# Altium PCB Conv_buck_R0.PcbDoc
Units mil, origin at the board's own origin, x right, y up, seen from the top; angles counter-clockwise.
Board outline 3937.01 x 5905.51 mil, 4 copper layers (Top Layer, Mid 1, Mid 2, Bottom Layer), stack 62.047 mil thick; 149 components, 73 nets, 409 pads, 0 vias.
Unrouted connection lines stored in the file: 294.
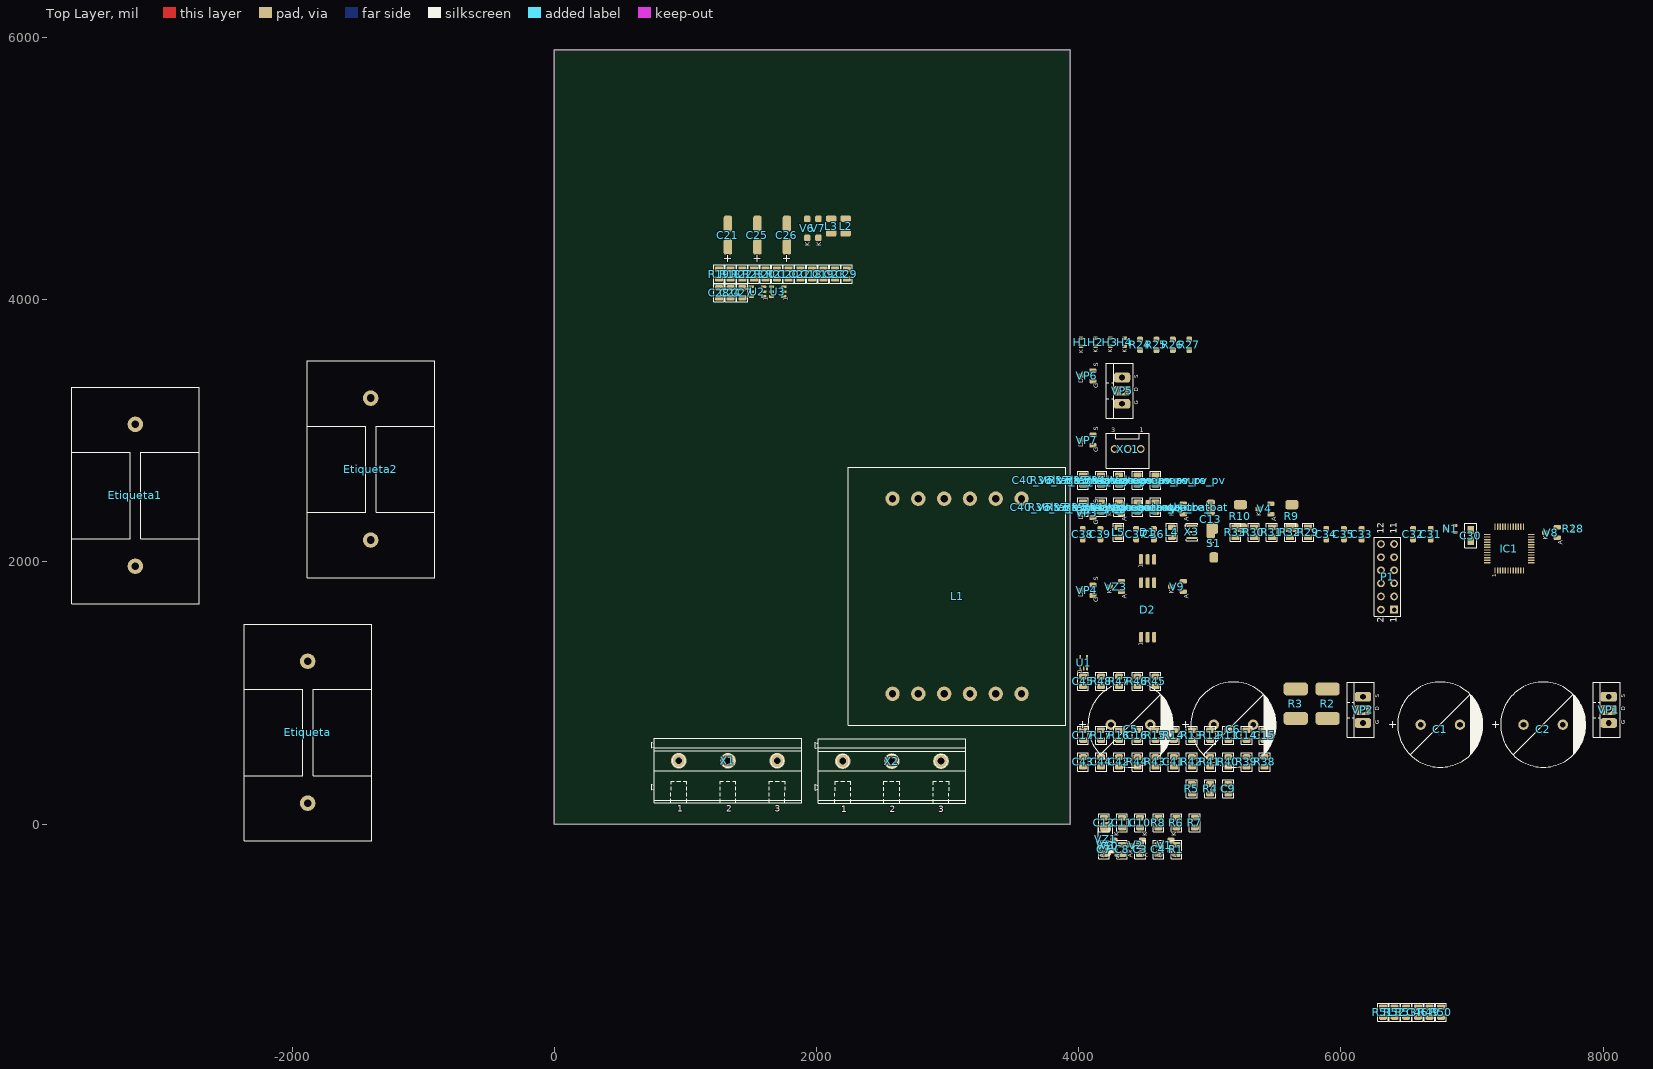
[diagram p0: Top Layer view]
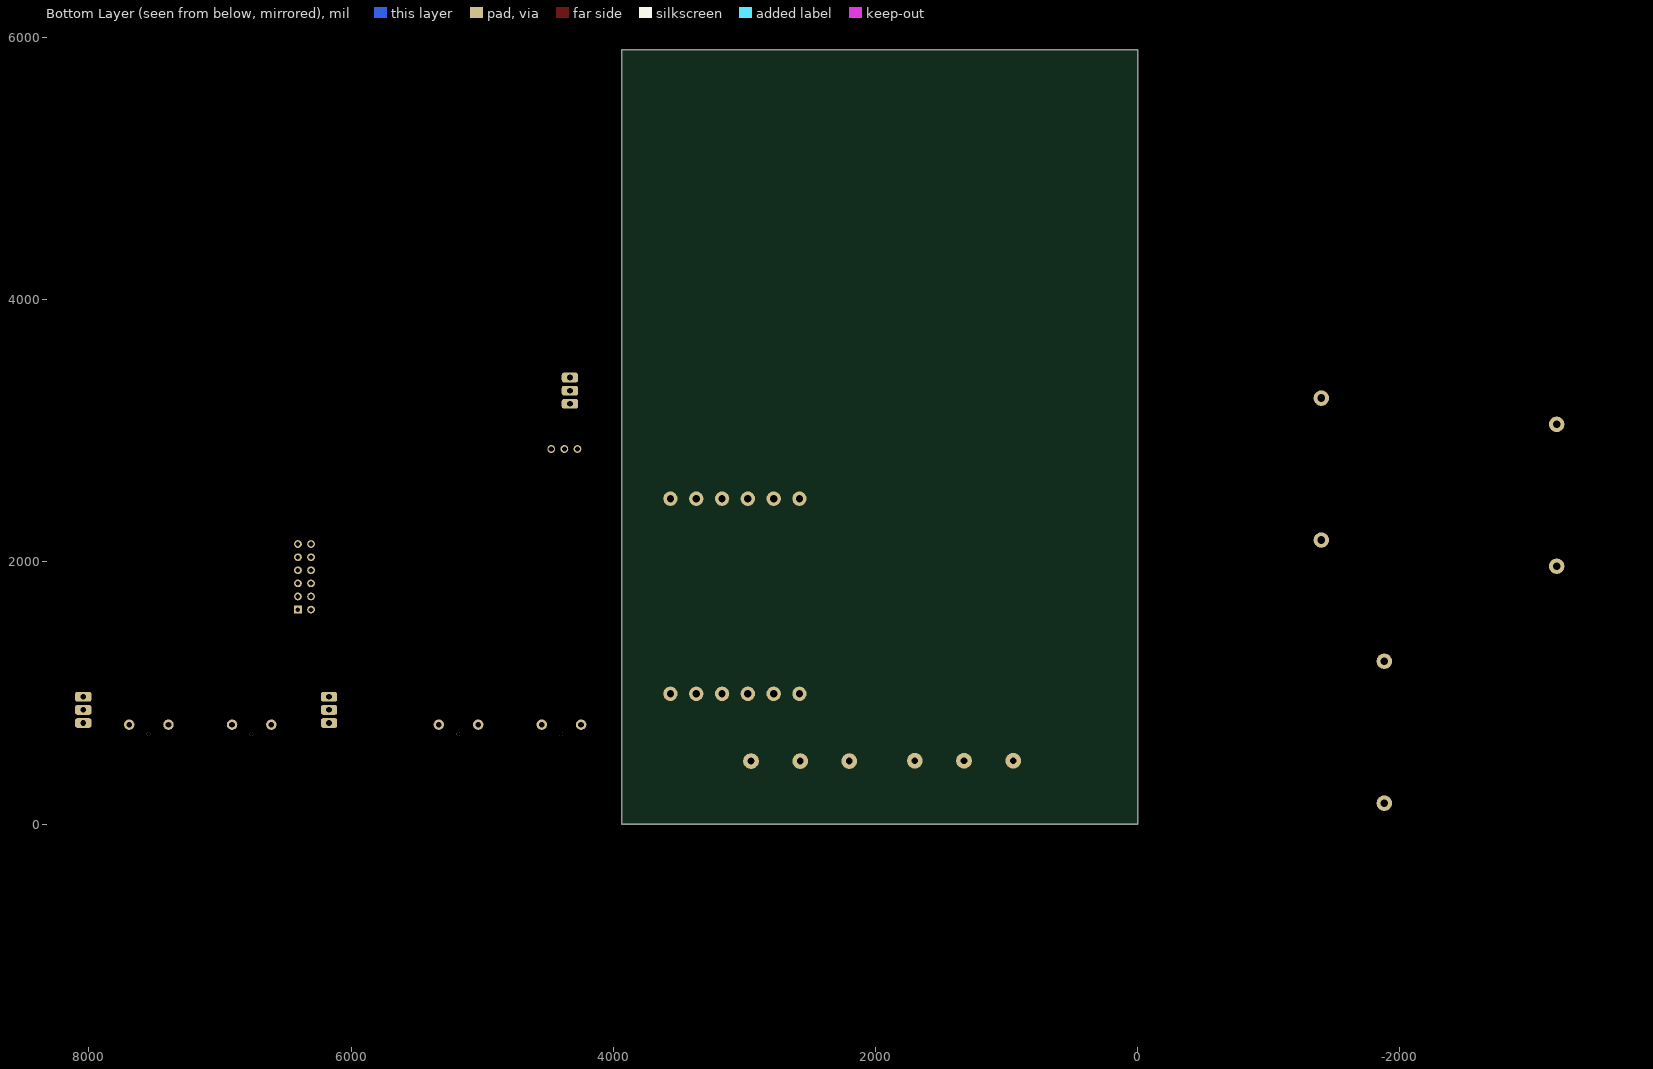
[diagram p1: Bottom Layer view, seen from below]

## Layer stack, top to bottom
Top Layer: signal copper 12.4016
Dielectric: prepreg 5, FR-4, Dk 4.2
Mid 1: signal copper 1.4173
Dielectric: core 24.4094, Dk 4.2
Mid 2: signal copper 1.4173
Dielectric: prepreg 5, Dk 4.2
Bottom Layer: signal copper 12.4016

## Board outline
0,0 3937.01,0 3937.01,5905.51 0,5905.51

## Design rules (kind name [scope] priority, off if disabled: settings)
AssemblyTestPointUsage [All] p1 off:
AssemblyTestpoint [All] p1 off: testpointundercomponent=TRUE minsize=40 maxsize=100 preferedsize=60 minholesize=0 maxholesize=40 preferedholesize=32 testpointgrid=1 usegrid=FALSE gridtolerance=0.01 allowsidebottom=TRUE minspacing=100
Clearance Terra [InNetClass('Terra') vs InNetClass('-UD') OR InNetClass('DGND')] p1: gap=315
Clearance -UD [InNetClass('-UD') vs InNetClass('Terra') OR InNetClass('DGND')] p2: gap=315
Clearance DGND [InNetClass('DGND') vs InNetClass('Terra') OR InNetClass('-UD')] p3: gap=315
Clearance "Mec Holes" [InNetClass('All Nets') vs InPadClass('Mec Holes')] p4: gap=12
Clearance "Fix Holes" [InNetClass('All Nets') vs InPadClass('Fix Holes')] p5: gap=196.85
Clearance "Keepout Clearance" [InNetClass('All Nets') vs IsKeepOut] p6: gap=11.82
Clearance "Clearance All 10mils" [All] p7: gap=9
ComponentClearance [All] p1 off: gap=10 collisioncheckmode=3 verticalgap=10 showdistances=FALSE
FabricationTestpoint [All] p1: side=2 testpointundercomponent=TRUE minsize=40 maxsize=100 preferedsize=60 minholesize=0 maxholesize=40 preferedholesize=32 testpointgrid=1 allowsidebottom=TRUE usegrid=FALSE gridtolerance=0.01 minspacing=100
FanoutControl Fanout_BGA [IsBGA] p1 off: bgadir=Out bgaviamode=Centered fanoutstyle=Auto fanoutdirection=Alternating viagrid=1 // Fanout_BGA (Default Rule)
FanoutControl Fanout_LCC [IsLCC] p2 off: bgadir=Out bgaviamode=Centered fanoutstyle=Auto fanoutdirection=Alternating viagrid=1 // Fanout_LCC (Default Rule)
FanoutControl Fanout_SOIC [IsSOIC] p3 off: bgadir=Out bgaviamode=Centered fanoutstyle=Auto fanoutdirection=Alternating viagrid=1 // Fanout_SOIC (Default Rule)
FanoutControl Fanout_Small [(CompPinCount < 5)] p4 off: bgadir=Out bgaviamode=Centered fanoutstyle=Auto fanoutdirection=OutThenIn viagrid=1 // Fanout_Small (Default Rule)
FanoutControl Fanout_Default [All] p5 off: bgadir=Out bgaviamode=Centered fanoutstyle=Auto fanoutdirection=Alternating viagrid=1 // Fanout_Default (Default Rule)
Height [All] p1 off: minheight=0 maxheight=1000 prefheight=500
HoleSize [All] p1: absolutevalues=TRUE maxlimit=393.7 minlimit=7.87 maxpercent=80.000 minpercent=20.000
MinimumSolderMaskSliver [All] p1 off: minsoldermaskwidth=10
NetAntennae [All] p1 off: netantennaetolerance=0
PolygonConnect "PolygonConnect Power" [InNetClass('All Nets') vs InNetClass('All Nets')] p1: connectstyle=Direct reliefconductorwidth=10 reliefentries=4 polygonreliefangle="90 Angle"
PolygonConnect [All] p2: connectstyle=Direct reliefconductorwidth=10 reliefentries=4 polygonreliefangle="90 Angle"
RoutingCorners [All] p1 off: cornerstyle=45-Degree minsetback=100 maxsetback=100
RoutingVias [All] p1: holewidth=11.81 width=25 viastyle="Through Hole" minholewidth=7.87 minwidth=25 maxholewidth=20 maxwidth=50
SilkToSilkClearance [All] p1 off: silktosilkclearance=10
SilkscreenOverComponentPads SilkToSolderMaskClearance [IsPad] p1 off: minsilkscreentomaskgap=10
SolderMaskExpansion [All] p1: expansion=4
Width [All] p1: maxlimit=500 minlimit=9 preferedwidth=10
12 further rules are at their usual default settings.

## Classes and differential pairs
component class uC: C30 C31 C32 C33 C34 C35 C36 C37 C38 C39 H1 H2 H3 H4 IC1 L4 L5 N1 P1 R24 R25 R26 R27 R28 R29 R30 R31 R32 R33 S1 V8 X3
channel class Voltage_measure: Voltage_measure_bat Voltage_measure_pv
component class Voltage_measure_pv: C40_Voltage_measure_pv R34_Voltage_measure_pv R35_Voltage_measure_pv R36_Voltage_measure_pv R37_Voltage_measure_pv
component class Voltage_measure_bat: C40_Voltage_measure_bat R34_Voltage_measure_bat R35_Voltage_measure_bat R36_Voltage_measure_bat R37_Voltage_measure_bat
component class SMPS: C18 C19 C20 C21 C22 C23 C24 C25 C26 C27 C28 C29 L2 L3 R18 R19 R20 R21 R22 R23 U2 U3 V6 V7
component class Output: C45 R45 R46 R47 R48 VP5 VP6
component class Current_measure_bat: C9 C10 C11 C12 R4 R5 R6 R7 R8 U1
component class Driver_rect: C41 C42 C43 C44 D2 R38 R39 R40 R41 R42 R43 R44 V9 VP4 VZ3
component class FAN: C46 R49 R50 R51 R52 R53 V10 VP7 XC1
component class Buck_converter: V1 V2 V3
component class Converter: C1 C2 C3 C4 C5 C6 C7 C8 L1 R1 R2 R3 VP1 VP2 X1 X2
component class Driver_SW: C13 C14 C15 C16 C17 D1 R9 R10 R11 R12 R13 R14 R15 R16 R17 V4 V5 VP3 VZ1 VZ2

## Components (designator, comment, footprint, x,y, rotation, side; value= is the part's Value field where it differs from the comment)
C1 "10190340" "CR 1.1 7.62 16.5" 6608.74,758.17 r0 top
C2 "10190340" "CR 1.1 7.62 16.5" 7393.74,758.17 r0 top
C3 "10192075" C0805_R_V0 4468.74,-194.33 r90 top
C4 "11736520" C0805_R_V0 4608.74,-194.33 r90 top
C5 "10190340" "CR 1.1 7.62 16.5" 4246.24,758.17 r0 top
C6 "10190340" "CR 1.1 7.62 16.5" 5031.24,758.17 r0 top
C7 "10192075" C0805_R_V0 4193.74,-194.33 r90 top
C8 "11736520" C0805_R_V0 4331.24,-194.33 r90 top
C9 "10192075" C0805_R_V0 5141.24,268.17 r90 top
C10 "10192075" C0805_R_V0 4468.74,10.67 r90 top
C11 "10192075" C0805_R_V0 4331.24,10.67 r90 top
C12 "10192075" C0805_R_V0 4193.74,10.67 r90 top
C13 "11690909" "CAP UUD CR 5X5.8" 5008.74,2238.17 r90 top
C14 "11736520" C0805_R_V0 5281.24,678.17 r90 top
C15 "10192075" C0805_R_V0 5418.74,678.17 r90 top
C16 "10192075" C0805_R_V0 4448.74,678.17 r90 top
C17 "10192075" C0805_R_V0 4033.74,678.17 r90 top
C18 "11736520" C0805_R_V0 1965.45,4195.63 r90 top
C19 "10192075" C0805_R_V0 2054.03,4195.63 r90 top
C20 "11736520" C0805_R_V0 1788.29,4195.63 r90 top
C21 "11690909" "CAP UUD CR 5X5.8" 1325,4404.98 r90 top
C22 "11736520" C0805_R_V0 1876.87,4195.63 r90 top
C23 "10192075" C0805_R_V0 2142.62,4195.63 r90 top
C24 "11736520" C0805_R_V0 1345.37,4051.93 r90 top
C25 "11690909" "CAP UUD CR 5X5.8" 1550,4404.98 r90 top
C26 "11690909" "CAP UUD CR 5X5.8" 1775,4404.98 r90 top
C27 "11736520" C0805_R_V0 1433.96,4051.93 r90 top
C28 "10192075" C0805_R_V0 1256.79,4051.93 r90 top
C29 "10192075" C0805_R_V0 2231.2,4195.63 r90 top
C30 "2u2F 6.8V 10%" 0805_R_V0 6991.24,2200.67 r90 top
C31 "11736520" C0805A 6686.24,2170.67 r90 top
C32 "2u2F 6.8V 10%" C0805A 6551.24,2170.67 r90 top
C33 "1uF 50V 10%" C0805A 6158.74,2170.67 r90 top
C34 "1uF 50V 10%" C0805A 5888.74,2170.67 r90 top
C35 "100nF 6.8V 10%" C0805A 6023.74,2170.67 r90 top
C36 "10nF 6.8V 10%" C0805A 4573.74,2170.67 r90 top
C37 "2u2F 6.8V 10%" C0805A 4438.74,2170.67 r90 top
C38 "36pF 50V" C0805A 4031.24,2170.67 r90 top
C39 "36pF 50V" C0805A 4166.24,2170.67 r90 top
C40_Voltage_measure_bat "10192075" C0805_R_V0 4033.74,2418.17 r90 top (schematic designator C40)
C40_Voltage_measure_pv "10192075" C0805_R_V0 4033.74,2623.17 r90 top (schematic designator C40)
C41 "10192075" C0805_R_V0 4726.24,473.17 r90 top
C42 "10192075" C0805_R_V0 4308.74,473.17 r90 top
C43 "11736520" C0805_R_V0 4033.74,473.17 r90 top
C44 "10192075" C0805_R_V0 4171.24,473.17 r90 top
C45 "10192075" C0805_R_V0 4033.74,1088.17 r90 top
C46 "10192075" C0805_R_V0 6587.54,-1434.35 r90 top
D1 "12544475" "SO-6 (11.5 MM)" 4476.24,2018.17 r90 top
D2 "12544475" "SO-6 (11.5 MM)" 4476.24,1425.67 r90 top
Etiqueta "Comment" DISSIPADOR_N004_40 -2365,1525 r270 top
Etiqueta1 "Comment" DISSIPADOR_N004_40 -3680,3332.5 r270 top
Etiqueta2 "Comment" DISSIPADOR_N004_40 -1885,3532.5 r270 top
H1 "12133537" "LED 0603_12133537(Primary)" 4018.74,3645.67 r90 top
H2 "12133535" "LED 0603_12133535(Primary)" 4128.74,3645.67 r90 top
H3 "12133535" "LED 0603_12133535(Primary)" 4241.24,3645.67 r90 top
H4 "12133535" "LED 0603_12133535(Primary)" 4351.24,3645.67 r90 top
IC1 "TMS320F28027_PT" LQFP48 7176.24,1933.17 r90 top
L1 "INDUTOR 100uH EE42" "INDUTOR EE42" 3072.5,1737.5 r270 top
L2 "12924787" L1210 2222,4506 r90 top
L3 "12924787" L1210 2112,4506 r90 top
L4 "Inductor" R0805_R_V0 4711.24,2225.67 r90 top
L5 "Inductor" R0805_R_V0 4303.74,2225.67 r90 top
N1 "10050567" SC70A 6836.24,2250.67 r90 top
P1 "Header 6X2" HDR2X6 6406.24,1635.67 r90 top
R1 "10118077" R0805_R_V0 4746.24,-194.33 r90 top
R2 "11372881" WSL2816A 5898.74,805.67 r90 top
R3 "11372881" WSL2816A 5656.24,805.67 r90 top
R4 "10118077" R0805_R_V0 5003.74,268.17 r90 top
R5 "10118077" R0805_R_V0 4863.74,268.17 r90 top
R6 "10118077" R0805_R_V0 4746.24,10.67 r90 top
R7 "10118077" R0805_R_V0 4886.24,10.67 r90 top
R8 "10118077" R0805_R_V0 4608.74,10.67 r90 top
R9 "10191999" R2010A 5626.24,2260.67 r90 top
R10 "10191999" R2010A 5233.74,2260.67 r90 top
R11 "10118077" R0805_R_V0 5141.24,678.17 r90 top
R12 "10118077" R0805_R_V0 5003.74,678.17 r90 top
R13 "10118077" R0805_R_V0 4863.74,678.17 r90 top
R14 "10118077" R0805_R_V0 4726.24,678.17 r90 top
R15 "10118077" R0805_R_V0 4586.24,678.17 r90 top
R16 "10118077" R0805_R_V0 4308.74,678.17 r90 top
R17 "10118077" R0805_R_V0 4171.24,678.17 r90 top
R18 "10191981" R0805_R_V0 1345.37,4195.63 r90 top
R19 "10191981" R0805_R_V0 1256.79,4195.63 r90 top
R20 "10191981" R0805_R_V0 1611.12,4195.63 r90 top
R21 "10191981" R0805_R_V0 1699.7,4195.63 r90 top
R22 "10191981" R0805_R_V0 1433.96,4195.63 r90 top
R23 "10191981" R0805_R_V0 1522.54,4195.63 r90 top
R24 "10191962" R0805A 4468.74,3615.67 r90 top
R25 "10191962" R0805A 4593.74,3615.67 r90 top
R26 "10191962" R0805A 4718.74,3615.67 r90 top
R27 "10191962" R0805A 4843.74,3615.67 r90 top
R28 "11417855" R0402 7771.24,2253.17 r90 top
R29 "1k 5% 0805" 0805_SH_R_V1 5751.24,2225.67 r90 top
R30 "1k 5% 0805" 0805_SH_R_V1 5336.24,2225.67 r90 top
R31 "1k 5% 0805" 0805_SH_R_V1 5473.74,2225.67 r90 top
R32 "1k 5% 0805" 0805_SH_R_V1 5613.74,2225.67 r90 top
R33 "1M 1% 0805" 0805_SH_R_V1 5196.24,2225.67 r90 top
R34_Voltage_measure_bat "10118077" R0805_R_V0 4586.24,2418.17 r90 top (schematic designator R34)
R34_Voltage_measure_pv "10118077" R0805_R_V0 4586.24,2623.17 r90 top (schematic designator R34)
R35_Voltage_measure_bat "10118077" R0805_R_V0 4448.74,2418.17 r90 top (schematic designator R35)
R35_Voltage_measure_pv "10118077" R0805_R_V0 4448.74,2623.17 r90 top (schematic designator R35)
R36_Voltage_measure_bat "10118077" R0805_R_V0 4171.24,2418.17 r90 top (schematic designator R36)
R36_Voltage_measure_pv "10118077" R0805_R_V0 4171.24,2623.17 r90 top (schematic designator R36)
R37_Voltage_measure_bat "10118077" R0805_R_V0 4308.74,2418.17 r90 top (schematic designator R37)
R37_Voltage_measure_pv "10118077" R0805_R_V0 4308.74,2623.17 r90 top (schematic designator R37)
R38 "10118077" R0805_R_V0 5418.74,473.17 r90 top
R39 "10118077" R0805_R_V0 5281.24,473.17 r90 top
R40 "10118077" R0805_R_V0 5141.24,473.17 r90 top
R41 "10118077" R0805_R_V0 5003.74,473.17 r90 top
R42 "10118077" R0805_R_V0 4863.74,473.17 r90 top
R43 "10118077" R0805_R_V0 4586.24,473.17 r90 top
R44 "10118077" R0805_R_V0 4448.74,473.17 r90 top
R45 "10118077" R0805_R_V0 4586.24,1088.17 r90 top
R46 "10118077" R0805_R_V0 4448.74,1088.17 r90 top
R47 "10118077" R0805_R_V0 4308.74,1088.17 r90 top
R48 "10118077" R0805_R_V0 4171.24,1088.17 r90 top
R49 "10118077" R0805_R_V0 6676.12,-1434.35 r90 top
R50 "10118077" R0805_R_V0 6764.7,-1434.35 r90 top
R51 "10118077" R0805_R_V0 6321.79,-1434.35 r90 top
R52 "10118077" R0805_R_V0 6410.37,-1434.35 r90 top
R53 "10118077" R0805_R_V0 6498.96,-1434.35 r90 top
S1 "10050610" "TECLA STSM BOURNS" 5031.24,2143.17 r90 top
U1 "OPA348AIDCKR" "DCK R-PDSO-G5" 4038.74,1230.67 r90 top
U2 "12576507" SOT23-6 1549.75,4061.28 r90 top
U3 "12576507" SOT23-6 1703.75,4061.28 r90 top
V1 "DIODO BAS40" SOT23-BAV99A 4658.74,-161.83 r90 top
V2 "DIODO BAS40" SOT23-BAV99A 4441.24,-161.83 r90 top
V3 "DIODO BAS40" SOT23-BAV99A 4223.74,-161.83 r90 top
V4 "10261302" SOT23A 5421.24,2403.17 r90 top
V5 "10261302" SOT23A 4753.74,2403.17 r90 top
V6 "10192125" SOD123A 1930,4471 r90 top
V7 "10192125" SOD123A 2015,4471 r90 top
V8 "10192124" SOT23A 7606.24,2223.17 r90 top
V9 "10261302" SOT23A 4753.74,1810.67 r90 top
V10 "10261302" SOT23A 4223.74,-166.83 r90 top
VP1 "10190449" "TO-220AB (Primary)" 8043.74,770.67 r90 top
VP2 "10190449" "TO-220AB (Primary)" 6168.74,770.67 r90 top
VP3 "11110327" MOS_SOT23A 4063.74,2375.67 r90 top
VP4 "11110327" MOS_SOT23A 4063.74,1783.17 r90 top
VP5 "10190449" "TO-220AB (Primary)" 4331.24,3205.67 r90 top
VP6 "11110327" MOS_SOT23A 4063.74,3418.17 r90 top
VP7 "11110327" MOS_SOT23A 4063.74,2928.17 r90 top
VZ1 "12665621" DO-214AC_12665621(Primary) 4206.24,-209.33 r90 top
VZ2 "10050447" ZEN_SOT23A 4281.24,2403.17 r90 top
VZ3 "10050447" ZEN_SOT23A 4281.24,1810.67 r90 top
X1 "10233722" 662-A-111/03-SM 950,482.5 r0 top
X2 "10233722" 662-A-111/03-SM 2200,480 r0 top
X3 "XTAL 60MHz" "XTAL  CSTCE_G_A" 4863.74,2228.17 r90 top
XC1 "10190697" "MOLEX 3P 180G M" 4473.74,2860.67 r0 top

## Footprints (in the part's own frame and the unit in brackets; to place one, negate y for a bottom-side part, rotate by r counter-clockwise, add the part's x,y. Pads: shape width x height; smd on the part's side, far side on the other; paste and mask are expansions set on the pad)
662-A-111/03-SM [mil]
  round 120 hole 51.18: 1(0,0) 2(375,0) 3(750,0)
  silkscreen extent -208,-320 938,170, body extent -218,-311 939,181, height 847
0805_R_V0 [mil]
  rect 60x50 smd: 1(-43.31,0) 2(43.31,0)
  silkscreen extent -93,-45 93,44
0805_SH_R_V1 [mm] "IPC"
  rect 1.1x1.55 smd: 1(0.95,0) 2(-0.95,0)
  silkscreen extent -1.75,-1.05 1.75,1.05, body extent -1.02,-0.63 0.98,0.62, height 0.78
C0805_R_V0 [mm] "IPC"
  rrect50% 1.1x1.55 smd: 1(0.95,0) 2(-0.95,0)
  silkscreen extent -1.75,-1.05 1.75,1.05, body extent -1,-0.62 1,0.63, height 0.78
C0805A [mil]
  rrect50% 45x45 smd: 1(0,0) 2(80,0)
  body extent 1,-25 79,25, height 31
"CAP UUD CR 5X5.8" [mil]
  rrect50% 122.05x65 smd: 1(0,0) 2(175,0)
  body extent -18,-104 198,104, height 236
"CR 1.1 7.62 16.5" [mil]
  round 27.6 hole 30 unplated: 0(152,-72)
  round 80 hole 43.31: 1(0,0) 2(300,0)
  silkscreen extent -175,-325 475,325, body extent -174,-324 475,324, height 1030
"DCK R-PDSO-G5" [mm] "SOT23, 5-Leads, Body 2x1.25mm, Pitch 0.65mm"
  rrect50% 0.762x0.338 smd: 1(-1.1,0.65) 2(-1.1,0) 3(-1.1,-0.65) 4(1.1,-0.65) 5(1.1,0.65)
  body extent -1.15,-1.05 1.15,1.05, height 1
DISSIPADOR_N004_40 [mm] "AAVID_6298B"
  round 3 hole 1.5: Fix1(7.2,12.3) Fix1(34.7,12.3)
  silkscreen extent 0,0 42,24.7, body extent -0.01,0.08 41.9,24.52, height 25.4
DO-214AC_12665621(Primary) [mil]
  rrect50% 80x80 smd: A(185,0) K(0,0)
  silkscreen extent -8,-55 192,55
HDR2X6 [mm] "Connector; Header; 6x2 Position"
  rect 1.5x1.5 hole 0.9: 1(0,0)
  round 1.5 hole 0.9: 2(0,2.54) 3(2.54,0) 4(2.54,2.54) 5(5.08,0) 6(5.08,2.54) 7(7.62,0) 8(7.62,2.54) 9(10.16,0) 10(10.16,2.54) 11(12.7,0) 12(12.7,2.54)
  silkscreen extent -1.27,-1.27 13.97,3.81
"INDUTOR EE42" [mm]
  round 2.794 hole 1.4: 1(-18.9,12.5) 1(-18.9,-7.5) 1(-18.9,-2.5) 1(-18.9,2.5) 1(-18.9,7.5) 1(-18.9,-12.5) 2(18.9,12.5) 2(18.9,-7.5) 2(18.9,-2.5) 2(18.9,2.5) 2(18.9,7.5) 2(18.9,-12.5)
  silkscreen extent -25,-21.1 25,21.1, body extent -25,-21.1 25,21.1, height 35
L1210 [mil] "Indutor SMD"
  rrect50% 50x80 smd: 1(0,0) 2(110,0)
  body extent -8,-50 118,48, height 98
"LED 0603_12133535(Primary)" [mil]
  rrect50% 28x35 smd: A(60,0) K(0,0)
  body extent -3,-18 63,18, height 35
"LED 0603_12133537(Primary)" [mil]
  rrect50% 28x35 smd: A(60,0) K(0,0)
  body extent -2,-18 64,18, height 35
LQFP48 [mil]
  rrect50% 48x10 smd: 1(0.15,-0.2) 2(0.15,-19.89) 3(0.15,-39.57) 4(0.15,-59.26) 5(0.15,-78.94) 6(0.15,-98.63) 7(0.15,-118.32) 8(0.15,-138) 9(0.15,-157.68) 10(0.15,-177.37) 11(0.15,-197.06) 12(0.15,-216.74) 25(335.3,-216.74) 26(335.3,-197.06) 27(335.3,-177.37) 28(335.3,-157.68) 29(335.3,-138) 30(335.3,-118.32) 31(335.3,-98.63) 32(335.3,-78.94) 33(335.3,-59.26) 34(335.3,-39.57) 35(335.3,-19.89) 36(335.3,-0.2)
  rrect50% 10x48 smd: 13(59.2,-275.8) 14(78.89,-275.8) 15(98.57,-275.8) 16(118.26,-275.8) 17(137.94,-275.8) 18(157.63,-275.8) 19(177.32,-275.8) 20(197,-275.8) 21(216.68,-275.8) 22(236.37,-275.8) 23(256.06,-275.8) 24(275.74,-275.8) 37(275.74,58.85) 38(256.06,58.85) 39(236.37,58.85) 40(216.68,58.85) 41(197,58.85) 42(177.32,58.85) 43(157.63,58.85) 44(137.94,58.85) 45(118.26,58.85) 46(98.57,58.85) 47(78.89,58.85) 48(59.2,58.85)
  body extent -10,-286 345,69, height 63
"MOLEX 3P 180G M" [mil]
  round 59.5 hole 39.37: 1(0,0) 2(-100,0) 3(-200,0)
  silkscreen extent -265,-145 65,120, body extent -263,-118 63,118, height 453
MOS_SOT23A [mil]
  rrect50% 35x55 smd: D(0,45) G(-40,-45) S(40,-45)
  body extent -57,-55 57,55, height 51
R0402 [mil]
  rrect50% 27x25 smd: 1(-20,0) 2(20,0)
  body extent -20,-10 20,10, height 20
R0805_R_V0 [mm] "IPC"
  rrect50% 1.1x1.55 smd: 1(0.95,0) 2(-0.95,0)
  silkscreen extent -1.75,-1.05 1.75,1.05, body extent -1.02,-0.63 0.98,0.62, height 0.78
R0805A [mil]
  rrect50% 45x45 smd: 1(0,0) 2(80,0)
  body extent 1,-25 79,25, height 31
R2010A [mil]
  rrect50% 70x100 smd: 1(0,0) 2(175,0)
  body extent -11,-50 186,50, height 22
SC70A [mil]
  rrect50% 20.98x34 smd: GND(-26,-36) VCC(0,36) ~RESET(26,-36)
  body extent -44,-44 44,44, height 44
"SO-6 (11.5 MM)" [mil]
  rrect50% 80x30 smd: 1(0,0) 2(0,-50) 3(0,-100) 4(415,-100) 5(415,-50) 6(415,0)
  body extent -19,-140 433,40, height 130
SOD123A [mil]
  rrect50% 50x50 smd: A(145,0) K(0,0)
  body extent -3,-34 149,33, height 57
SOT23-6 [mil]
  rrect50% 20x40 smd: 1(-37.5,-47.5) 2(0,-47.5) 3(37.5,-47.5) 4(37.5,47.5) 5(0,47.5) 6(-37.5,47.5)
  body extent -57,-55 57,55, height 57
SOT23-BAV99A [mil]
  rrect50% 35x55 smd: A(-40,-45) AK(0,45) K(40,-45)
  body extent -57,-55 57,55, height 51
SOT23A [mil]
  rrect50% 35x55 smd: A(-40,-45) K(0,45) NC(40,-45)
  body extent -57,-55 57,55, height 51
"TECLA STSM BOURNS" [mil]
  rrect50% 80x65 smd: 1(-110,0) 2(110,0)
  body extent -140,-69 144,69, height 169
"TO-220AB (Primary)" [mm]
  rrect50% 1.905x3.175 hole 1.1: D(2.54,0) G(0,0) S(5.08,0)
  silkscreen extent -2.79,-2.21 7.87,3.05, body extent -2.8,-2.18 7.88,2.65, height 19.89
WSL2816A [mm]
  rrect50% 2.54x4.7 smd: 1(0,0) 2(5.715,0)
  body extent -0.82,-2.22 6.53,2.23, height 0.91
"XTAL  CSTCE_G_A" [mm]
  rect 0.4x2.1 smd: 0(0,0) 1(1.2,0) 2(-1.2,0)
  silkscreen extent -1.7,-1.1 1.7,1.4, body extent -1.6,-0.6 1.6,0.7, height 0.7
ZEN_SOT23A [mil]
  rrect50% 35x55 smd: A(-40,-45) K(0,45) NC(40,-45)
  body extent -57,-55 57,55, height 51

## Part data
C1 C2 C5 C6: "CAP ELE 1000uF 50V"
C3 C7 C9 C10 C11 C12 C15 C16 C17 C19 C23 C28 C29 C40_Voltage_measure_bat C40_Voltage_measure_pv C41 C42 C44 C45 C46: "CER SMD 100nF 50V"
C4 C8 C14 C18 C20 C22 C24 C27 C31 C43: "CER SMD X7R 1uF 50V 10%"
C13 C21 C25 C26: "CAP. ELET. SMD 22uF 35V"
C30 C32 C33 C34 C35 C36 C37: library part 11736520, "CER SMD X7R 1uF 50V 10%"
C38 C39: library part 11736520, "CER SMD C0G 36pF 50V"
D1 D2: "CI SMD ACPL-W343"
H1: "LED SMD VM (0603)"
H2 H3 H4: "LED SMD VD (0603)"
IC1: "LQFP48"
L1: library part 12578205, "INDUTOR 560uH 4A PCV-2"
L2 L3: "INDUTOR SMD 47uH 390mA"
N1: "CI SMD ADM803TAKSZ"
P1: "Header, 6-Pin, Dual row"
R1 R4 R5 R6 R7 R8 R11 R12 R13 R14 R15 R16 R17 R34_Voltage_measure_bat R34_Voltage_measure_pv R35_Voltage_measure_bat R35_Voltage_measure_pv R36_Voltage_measure_bat R36_Voltage_measure_pv R37_Voltage_measure_bat R37_Voltage_measure_pv R38 R39 R40 R41 R42 R43 R44 R45 R46 R47 R48 R49 R50 R51 R52 R53: "RFM SMD 1K 1% 0.1W"
R2 R3: "RFM SMD 0R015 1% 2W"
R9 R10: "RFM SMD 1K 1% 0.5W"
R18 R19 R20 R21 R22 R23: "RFM SMD 150R 1% 0.1W"
R24 R25 R26 R27: "RFM SMD 330R 5% 0.1W"
R28: "RES SMD 4K7 5% 0,063W"
R29 R30 R31 R32 R33: library part Res3_2, "Resistor"
S1: "Tecla SMD STSM-31-STR"
U1: "1 MHz, 45 uA, RRIO, Single Operational Amplifier, 2.1 to 5.5 V, -40 to 125 degC, 5-pin SOT23 (DCK5), Green (RoHS & no Sb/Br)"
U2 U3: "CI SMD LM2842"
V1 V2 V3 V8: "DIODO SMD BAS40"
V4 V5 V9 V10: "DIODO SMD BAS16"
V6 V7: "Diodo SMD MBR0540 (SCHOTTKY)"
VP1 VP2 VP5: "MOSFET IRFB31N20D"
VP3 VP4 VP6 VP7: "MOSFET SMD BSH111"
VZ1: "ZENER SMD 15V 2W"
VZ2 VZ3: "Zener  SMD BZX84C18"
X1 X2: "CON. EK950V-03P"
X3: library part XTAL, "Crystal Oscillator"
XC1: "CON MOLEX 3P 180G"

## Nets (pads, with @x,y where several pads share a name; then routed paths per layer and width w, separated by ;. In a path a pad name is that pad's centre, name@x,y a point inside that pad or via, vN(x,y) a via of type N, cw(c..) or ccw(c..) an arc to the next point about the centre after c; other vN are vias at no path point)
3V3: C12.2 C23.2 C24.2 C25.1 C34.1 C35.1 L3.2 L4.1 L5.2 N1.VCC P1.12 R12.1 R22.2 R23.2 R24.2 R25.2 R26.2 R27.2 R28.2 R29.2 R30.2 R31.2 R39.1 R49.2 U1.5 V1.K V2.K V3.K V8.K V10.K
15V: C19.2 C20.2 C21.1 C43.2 C44.2 D2.6 L2.2 R19.2 R20.2 XC1.1
\R\E\S\E\T\: C31.1 C36.1 IC1.3 N1.~RESET R28.1 R29.1 S1.2 V8.A
BAT+: C1.1 C2.1 C3.1 C4.1 C26.1 C27.2 C28.2 C29.2 L1.2 R1.1 R34_Voltage_measure_bat.2 U2.4 U2.5 U3.4 U3.5 X1.3
FAN_PWR: IC1.38 R52.1
FAN_SPEED: R51.2 V10.A
GATE_RECT: C41.2 R40.2 R42.2 V9.A VP2.G VZ3.K
GATE_SW: C16.2 R13.2 R15.2 V5.A VP1.G VZ2.K
GND: C1.2 C2.2 C3.2 C4.2 C10.1 C11.1 C12.1 C17.1 C19.1 C20.1 C21.2 C23.1 C24.1 C25.2 C26.2 C27.1 C28.1 C29.1 C30.2 C31.2 C32.2 C33.2 C34.2 C35.2 C36.2 C37.1 C38.1 C39.2 C40_Voltage_measure_bat.1 C40_Voltage_measure_pv.1 C41.1 C42.1 C43.1 C44.1 C45.1 C46.1 D2.4 IC1.12 IC1.33 IC1.34 IC1.44 N1.GND P1.2 P1.10 R1.2 R2.2 R3.2 R17.1 R18.2 R21.2 R32.2 R36_Voltage_measure_bat.1 R36_Voltage_measure_pv.1 R37_Voltage_measure_bat.1 R37_Voltage_measure_pv.1 R42.1 R44.1 R45.2 R48.1 R53.1 S1.1 U1.1 U1.2 U2.2 U3.2 V1.A V2.A V3.A V6.A V7.A VP3.S VP4.S VP5.S VP6.S VP7.S VZ3.A X2.1 X2.3
GPIO34: IC1.19 P1.1 R30.1
HOT_SPOT: C13.2 C14.2 C15.1 C16.1 D1.4 L1.1 R15.1 VP1.S VP2.D VZ1.A VZ2.A
IO: C10.2 IC1.9 R8.2 V3.AK
LED_BAT: H3.K IC1.26
LED_FAULT: H1.K IC1.29
LED_OUT: H4.K IC1.25
LED_PV: H2.K IC1.27
NetC9_1: C9.1 R4.1 R5.1 R7.2 U1.3
NetC9_2: C9.2 R4.2 R5.2 R8.1 U1.4
NetC11_2: C11.2 R6.2 R7.1
NetC17_2: C17.2 R16.2 R17.2 VP3.G
NetC18_1: C18.1 U2.1
NetC18_2: C18.2 L2.1 U2.6 V6.K
NetC22_1: C22.1 U3.1
NetC22_2: C22.2 L3.1 U3.6 V7.K
NetC38_2: C38.2 IC1.45 R33.1 X3.1
NetC39_1: C39.1 IC1.46 R33.2 X3.2
NetC42_2: C42.2 R43.2 R44.2 VP4.G
NetC45_2: C45.2 R47.2 R48.2 VP6.G
NetC46_2: C46.2 R52.2 R53.2 VP7.G
NetD1_1: D1.1 R12.2
NetD1_3: D1.3 R14.2
NetD1_5: D1.5 R11.1 R13.1
NetD2_1: D2.1 R39.2
NetD2_3: D2.3 R41.2
NetD2_5: D2.5 R38.1 R40.1
NetH1_A: H1.A R24.1
NetH2_A: H2.A R25.1
NetH3_A: H3.A R26.1
NetH4_A: H4.A R27.1
NetR9_2: R9.2 R10.2 V4.A
NetR11_2: R11.2 V5.K
NetR14_1: R14.1 VP3.D
NetR18_1: R18.1 R19.1 R20.1 U2.3
NetR21_1: R21.1 R22.1 R23.1 U3.3
NetR34_Voltage_measure_bat_1: R34_Voltage_measure_bat.1 R35_Voltage_measure_bat.2 R36_Voltage_measure_bat.2 R37_Voltage_measure_bat.2
NetR34_Voltage_measure_pv_1: R34_Voltage_measure_pv.1 R35_Voltage_measure_pv.2 R36_Voltage_measure_pv.2 R37_Voltage_measure_pv.2
NetR38_2: R38.2 V9.K
NetR41_1: R41.1 VP4.D
NetR45_1: R45.1 R46.2 VP5.G
NetR46_1: R46.1 VP6.D
NetR49_1: R49.1 R51.1 XC1.3
NetR50_1: R50.1 VP7.D
NetR50_2: R50.2 XC1.2
OUTPUT: VP5.D X2.2
PV_+: C5.1 C6.1 C7.1 C8.1 R9.1 R10.1 R34_Voltage_measure_pv.2 VP1.D X1.1
PV_-: C5.2 C6.2 C7.2 C8.2 R2.1 R3.1 R6.1 VP2.S X1.2
PWM1B: IC1.28 R16.1
PWM2A: IC1.37 R43.1
PWM3A: IC1.39 R47.1
SCI_RX: IC1.48 P1.4
SCI_TX: IC1.1 P1.6
TCK: P1.3
TDI: IC1.20 P1.5
TDO: IC1.22 P1.9 R31.1
TMS: IC1.21 P1.7
TRST: IC1.2 P1.11 R32.1
VBAT: C40_Voltage_measure_pv.2 IC1.5 R35_Voltage_measure_pv.1 V1.AK
VCC_SW: C13.1 C14.1 C15.2 D1.6 V4.K VZ1.K
VDD: C33.1 IC1.35 L4.2
VDD1: C32.1 IC1.32
VDD2: C37.2 IC1.43
VDDA: C30.1 IC1.11 L5.1
VIN_PV: C40_Voltage_measure_bat.2 IC1.7 R35_Voltage_measure_bat.1 V2.AK
pads on no net: C1.0 C2.0 C5.0 C6.0 D1.2 D2.2 Etiqueta1.Fix1 Etiqueta2.Fix1 Etiqueta.Fix1 IC1.4 IC1.6 IC1.8 IC1.10 IC1.13 IC1.14 IC1.15 IC1.16 IC1.17 IC1.18 IC1.23 IC1.24 IC1.30 IC1.31 IC1.36 IC1.40 IC1.41 IC1.42 IC1.47 P1.8 V4.NC V5.NC V8.NC V9.NC V10.NC VZ2.NC VZ3.NC X3.0

## Keep-outs
Keep-Out Layer:
  the board outline again, w5

## Text inside footprints (layer, text, board x,y; h text height)
C1: Top Overlay "+" at 6360.74,730.17 h62.5
C2: Top Overlay "+" at 7145.74,730.17 h62.5
C5: Top Overlay "+" at 3998.24,730.17 h62.5
C6: Top Overlay "+" at 4783.24,730.17 h62.5
C13: Top Overlay "+" at 5033.74,2110.67 h60 r90
C21: Top Overlay "+" at 1350,4277.48 h60 r90
C25: Top Overlay "+" at 1575,4277.48 h60 r90
C26: Top Overlay "+" at 1800,4277.48 h60 r90
D1: Top Overlay "1" at 4488.24,1953.17 h31.25 r90
D2: Top Overlay "1" at 4488.24,1360.67 h31.25 r90
H1: Top Overlay "K" at 4034.74,3591.67 h31.25 r90
H2: Top Overlay "K" at 4144.74,3593.67 h31.25 r90
H3: Top Overlay "K" at 4257.24,3593.67 h31.25 r90
H4: Top Overlay "K" at 4367.24,3593.67 h31.25 r90
IC1: Top Overlay "1" at 7186.24,1880.67 h31.25 r90
P1: Top Overlay "2" at 6326.24,1535.67 h50 r90; Top Overlay "1" at 6426.24,1535.67 h50 r90; Top Overlay "1" at 6426.24,2215.67 h50 r90; Top Overlay "1" at 6426.24,2255.67 h50 r90; Top Overlay "12" at 6326.24,2215.67 h50 r90
U1: Top Overlay "1" at 4023.24,1152.17 h30 r90
U2: Top Overlay "1" at 1627.25,3991.28 h31.25 r90
U3: Top Overlay "1" at 1781.25,3991.28 h31.25 r90
V1: Top Overlay "K" at 4742.74,-91.83 h37.5 r90; Top Overlay "AK" at 4630.74,-256.83 h37.5 r90; Top Overlay "A" at 4743.74,-254.33 h37.5 r90
V2: Top Overlay "K" at 4525.24,-91.83 h37.5 r90; Top Overlay "AK" at 4413.24,-256.83 h37.5 r90; Top Overlay "A" at 4526.24,-254.33 h37.5 r90
V3: Top Overlay "K" at 4307.74,-91.83 h37.5 r90; Top Overlay "AK" at 4195.74,-256.83 h37.5 r90; Top Overlay "A" at 4308.74,-254.33 h37.5 r90
V4: Top Overlay "A" at 5506.24,2310.67 h37.5 r90; Top Overlay "K" at 5393.74,2348.17 h37.5 r90
V5: Top Overlay "A" at 4838.74,2310.67 h37.5 r90; Top Overlay "K" at 4726.24,2348.17 h37.5 r90
V6: Top Overlay "K" at 1950,4408 h37.5 r90
V7: Top Overlay "K" at 2035,4408 h37.5 r90
V8: Top Overlay "K" at 7578.74,2168.17 h37.5 r90; Top Overlay "A" at 7691.24,2130.67 h37.5 r90
V9: Top Overlay "A" at 4838.74,1718.17 h37.5 r90; Top Overlay "K" at 4726.24,1755.67 h37.5 r90
V10: Top Overlay "A" at 4308.74,-259.33 h37.5 r90; Top Overlay "K" at 4196.24,-221.83 h37.5 r90
VP1: Top Overlay "G" at 8168.74,761.67 h30 r90; Top Overlay "S" at 8168.74,963.67 h30 r90; Top Overlay "D" at 8168.74,863.67 h30 r90
VP2: Top Overlay "G" at 6293.74,761.67 h30 r90; Top Overlay "S" at 6293.74,963.67 h30 r90; Top Overlay "D" at 6293.74,863.67 h30 r90
VP3: Top Overlay "D" at 4036.24,2320.67 h37.5 r90; Top Overlay "G" at 4148.74,2283.17 h37.5 r90; Top Overlay "S" at 4147.74,2447.17 h37.5 r90
VP4: Top Overlay "D" at 4036.24,1728.17 h37.5 r90; Top Overlay "G" at 4148.74,1690.67 h37.5 r90; Top Overlay "S" at 4147.74,1854.67 h37.5 r90
VP5: Top Overlay "G" at 4456.24,3196.67 h30 r90; Top Overlay "S" at 4456.24,3398.67 h30 r90; Top Overlay "D" at 4456.24,3298.67 h30 r90
VP6: Top Overlay "D" at 4036.24,3363.17 h37.5 r90; Top Overlay "G" at 4148.74,3325.67 h37.5 r90; Top Overlay "S" at 4147.74,3489.67 h37.5 r90
VP7: Top Overlay "D" at 4036.24,2873.17 h37.5 r90; Top Overlay "G" at 4148.74,2835.67 h37.5 r90; Top Overlay "S" at 4147.74,2999.67 h37.5 r90
VZ1: Comp Mec "K" at 4306.24,-259.33 h37.5 r90
VZ2: Top Overlay "A" at 4366.24,2310.67 h37.5 r90; Top Overlay "K" at 4253.74,2348.17 h37.5 r90
VZ3: Top Overlay "A" at 4366.24,1718.17 h37.5 r90; Top Overlay "K" at 4253.74,1755.67 h37.5 r90
X1: Top Overlay "2" at 1310,92.5 h50; Top Overlay "3" at 1680,92.5 h50; Top Overlay "1" at 940,92.5 h50
X2: Top Overlay "2" at 2560,90 h50; Top Overlay "3" at 2930,90 h50; Top Overlay "1" at 2190,90 h50
XC1: Top Overlay "1" at 4466.74,2986.67 h37.5; Top Overlay "3" at 4247.74,2986.67 h37.5